# Altium PCB sdram_xsds.PcbDoc
Units mm, origin at the board's own origin, x right, y up, seen from the top; angles counter-clockwise.
Board outline 23.2 x 49.92 mm, 4 copper layers (Top Layer, Signal Layer 2, Signal Layer 1, Bottom Layer), stack 1.651 mm thick; 20 components, 40 nets, 187 pads, 178 vias.
Unrouted connection lines stored in the file: 16.
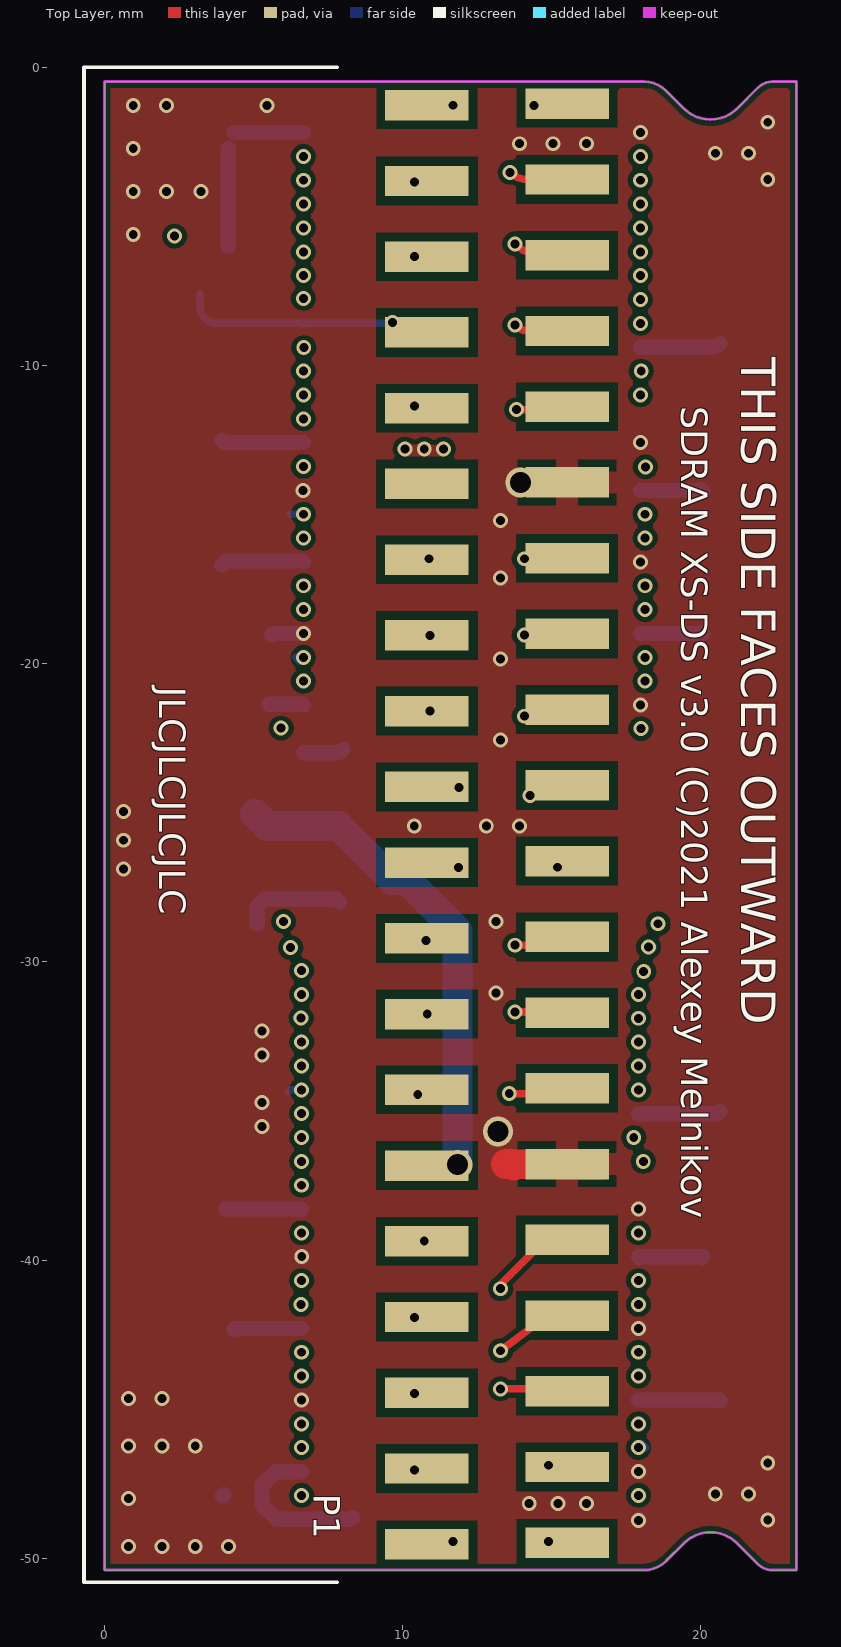
[diagram p0: Top Layer view]
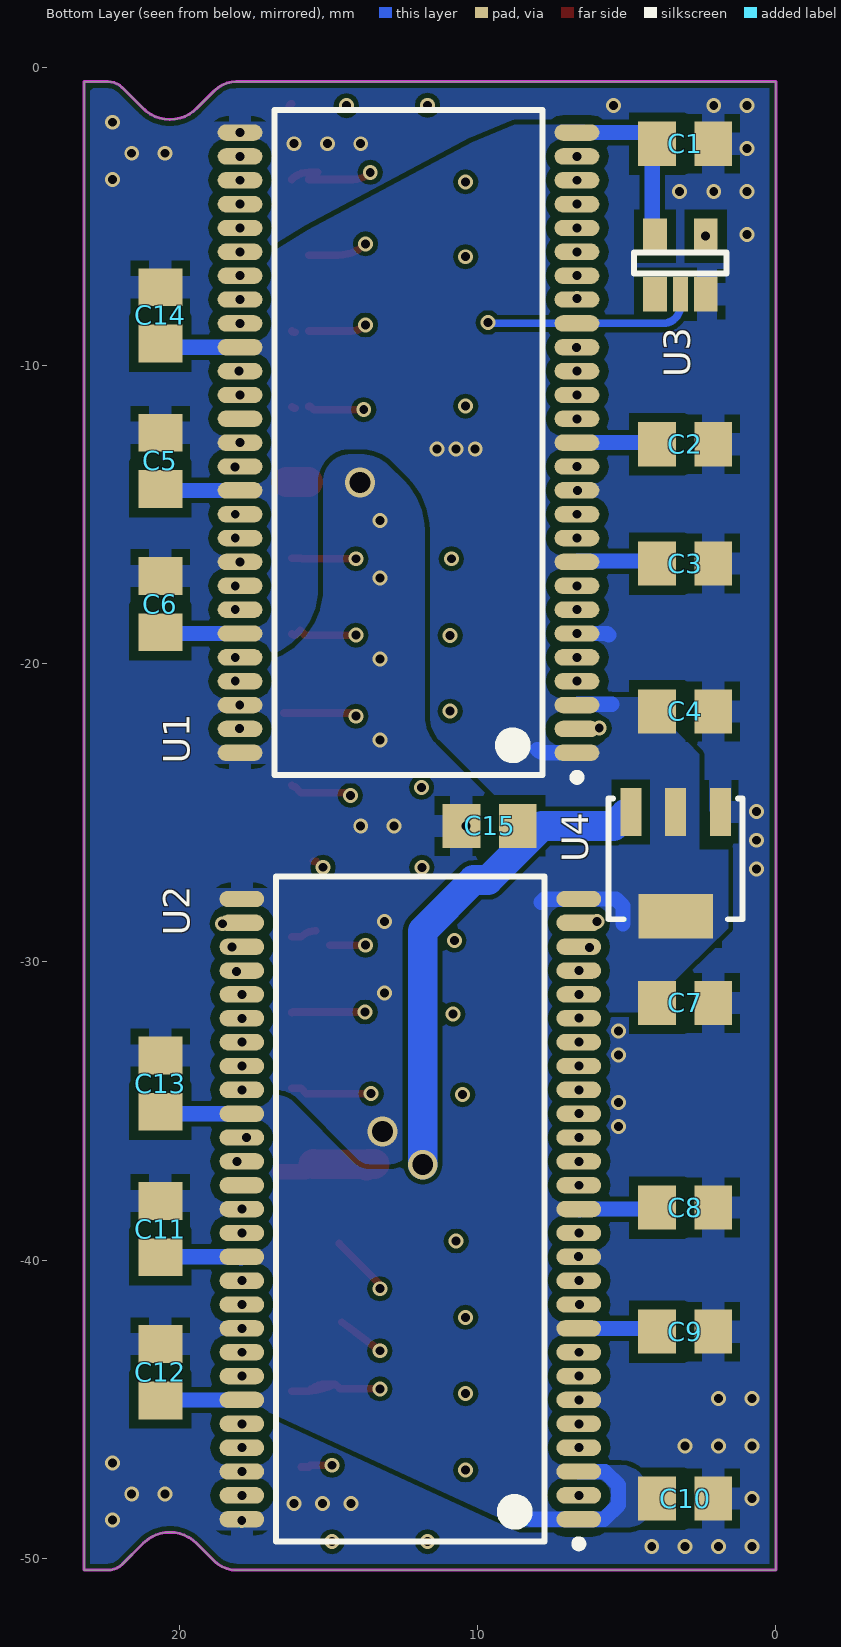
[diagram p1: Bottom Layer view, seen from below]
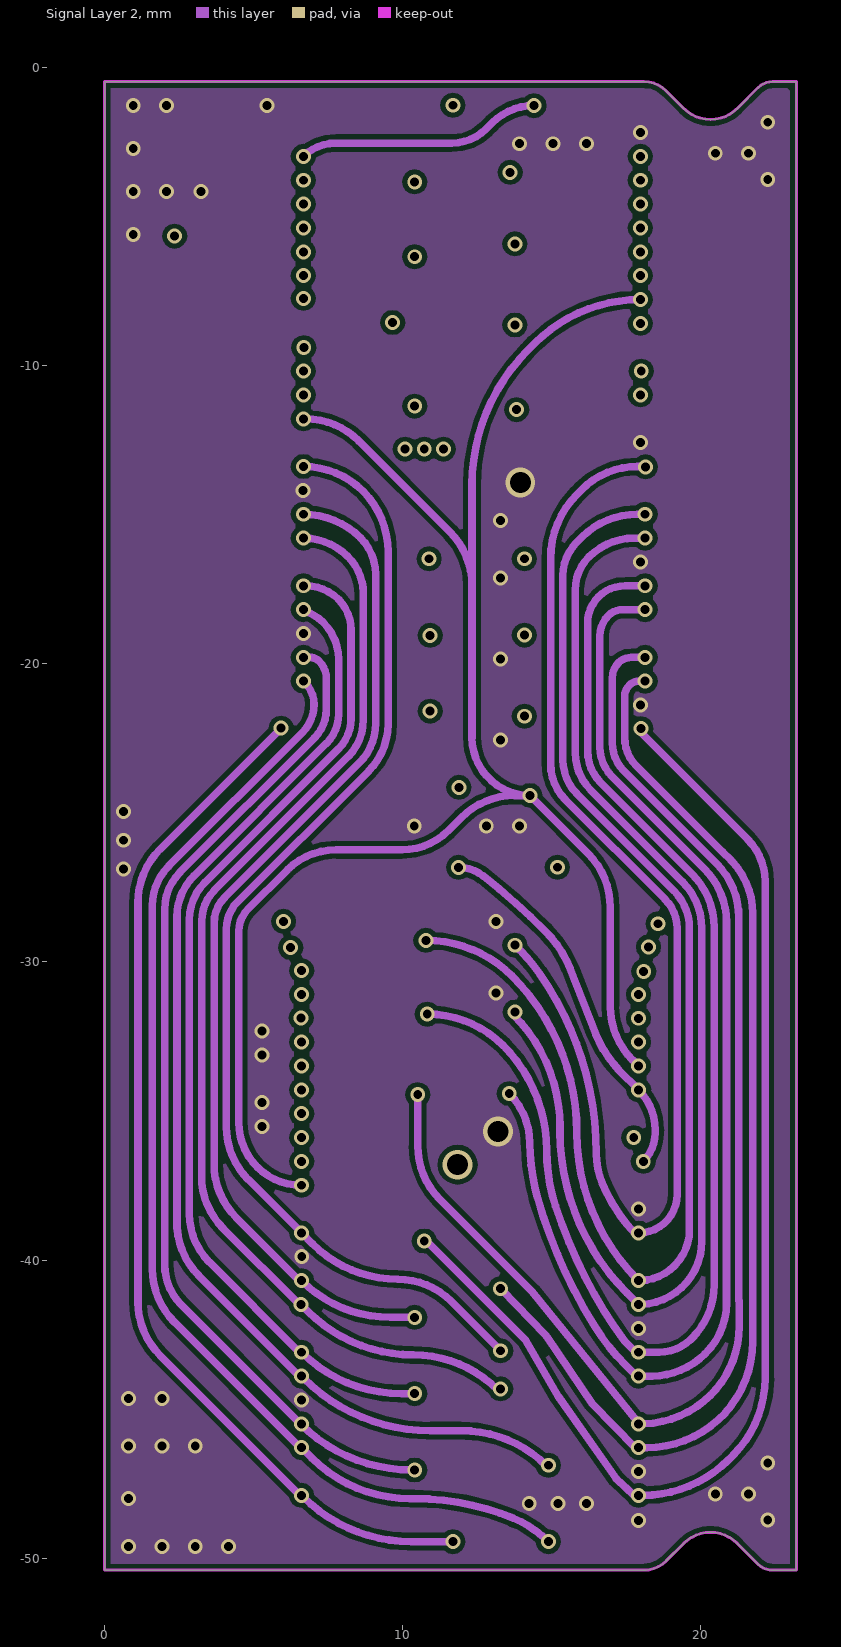
[diagram p2: Signal Layer 2]
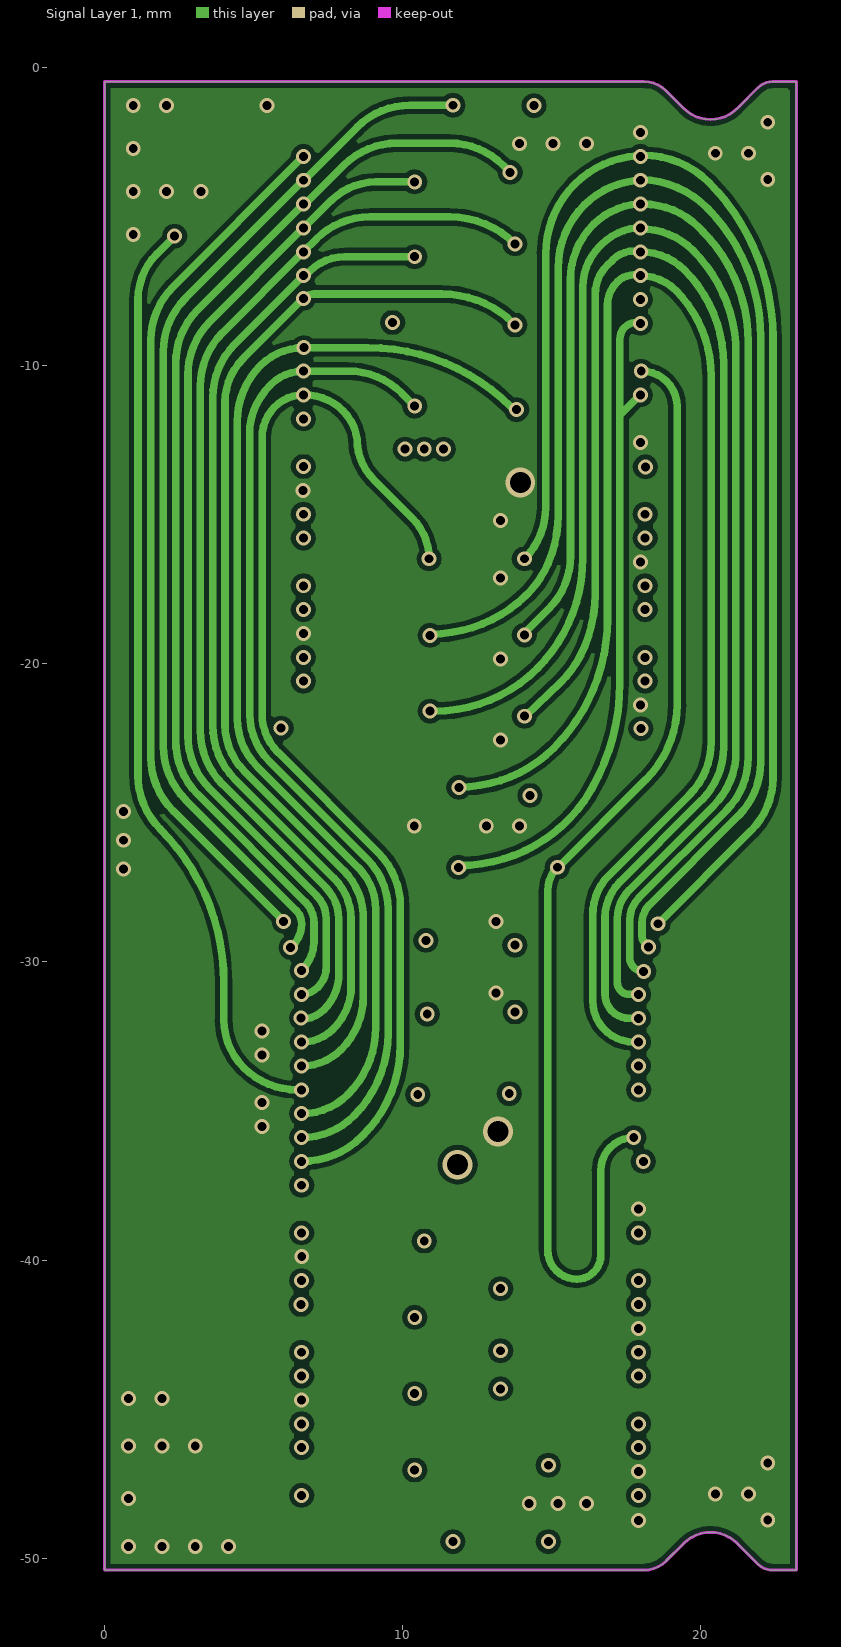
[diagram p3: Signal Layer 1]
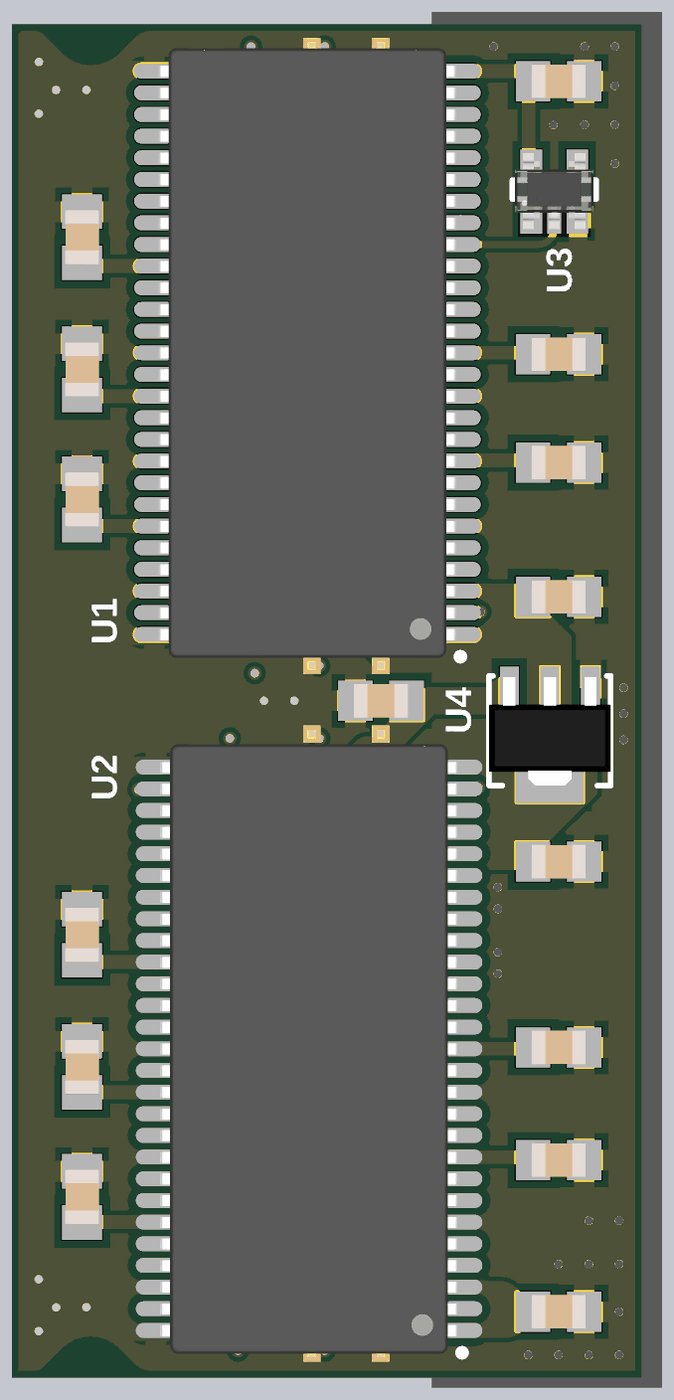
[diagram p4: 3D render of the assembled board from below, using the file's embedded part models]

## Layer stack, top to bottom
Top Solder: solder mask 0.0102, Solder Resist, Dk 3.5
Top Layer: signal copper 0.0356
Dielectric 2: core 0.254, Dk 4.2
Signal Layer 2: signal copper 0.036
Dielectric 5: prepreg 1, Dk 4.2
Signal Layer 1: signal copper 0.036
Dielectric 4: core 0.254, Dk 4.2
Bottom Layer: signal copper 0.0356
Bottom Solder: solder mask 0.0102, Solder Resist, Dk 3.5

## Board outline
0,-50.4 17.145,-50.4 18.08,-50.4 ccw(c18.08,-49.328) 18.838,-50.086 19.422,-49.502 cw(c20.32,-50.4) 20.32,-49.13 cw(c20.32,-50.4) 21.218,-49.502 21.915,-50.199 ccw(c22.4,-49.714) 22.4,-50.4 23.2,-50.4 23.2,-0.48 22.395,-0.48 ccw(c22.395,-1.158) 21.916,-0.678 21.256,-1.338 cw(c20.32,-0.48) 20.32,-1.75 cw(c20.32,-0.48) 19.384,-1.338 18.828,-0.783 ccw(c18.098,-1.514) 18.098,-0.48 17.145,-0.48 9.271,-0.48 0,-0.48

## Design rules (kind name [scope] priority, off if disabled: settings)
BoardOutlineClearance [All] p1: gap=0 ignorepadtopadclearanceinfootprint=FALSE
Clearance keep-out_clearance [InNamedPolygon('power') vs OnLayer('Keep-Out Layer')] p1: gap=0 ignorepadtopadclearanceinfootprint=FALSE
Clearance keep-out_clearance_1 [IsBoardCutoutRegion vs InNamedPolygon('power')] p2: gap=0 ignorepadtopadclearanceinfootprint=FALSE
Clearance [All] p3: gap=0.16 ignorepadtopadclearanceinfootprint=TRUE except(0: Arc-Hole Track-Hole SMDPad-Hole THPad-Hole Via-Hole Fill-Hole Poly-Hole Region-Hole Text-Hole; 0.3: SMDPad-Fill SMDPad-Poly SMDPad-Region THPad-Fill THPad-Poly THPad-Region)
ComponentClearance [All] p1 off: gap=0.254 collisioncheckmode=3 verticalgap=0.254 showdistances=FALSE
Height [All] p1 off: minheight=0 maxheight=25.4 prefheight=12.7
HoleSize [All] p1: absolutevalues=TRUE maxlimit=6 minlimit=0.025 maxpercent=80.000 minpercent=20.000
HoleToHoleClearance [All] p1: gap=0.127 allowstackedmicrovias=TRUE
MinimumSolderMaskSliver [All] p1: minsoldermaskwidth=0.25
PolygonConnect PolygonConnect_2 [IsVia or InNet('VCC')] p1: connectstyle=Direct reliefconductorwidth=0.762 reliefentries=4 polygonreliefangle="90 Angle" airgapwidth=0.254
PolygonConnect [All] p2: connectstyle=Relief reliefconductorwidth=0.762 reliefentries=4 polygonreliefangle="90 Angle" airgapwidth=0.254
RoutingCorners [All] p1: cornerstyle=Round minsetback=2.54 maxsetback=2.54
RoutingVias [All] p1: holewidth=0.3 width=0.5 viastyle="Through Hole" minholewidth=0.3 minwidth=0.5 maxholewidth=1 maxwidth=1.5
ShortCircuit [IsBoardCutoutRegion] p1: allowed=TRUE
ShortCircuit ShortCircuit_1 [All] p2: allowed=FALSE
SilkToSolderMaskClearance [IsPad] p1 off: minsilkscreentomaskgap=0.127 clearancetoexposedcopper=TRUE
SolderMaskExpansion SolderMaskExpansion_U1 [InComponent('U1')] p1: expansion=0 istentingtop=FALSE
SolderMaskExpansion [All] p2: expansion=0.051 istentingtop=FALSE
Width Width_power [InNetClass('power')] p1: maxlimit=2 minlimit=0.254 preferedwidth=0.508 midlayer1_maxwidth=0.254 midlayer1_prefwidth=0.254 midlayer2_maxwidth=0.254 midlayer2_prefwidth=0.254 minimp=50.000000 maximp=50.000000 favimp=50.000000
Width Width_signal [All] p2: maxlimit=0.254 minlimit=0.254 preferedwidth=0.254
22 further rules are at their usual default settings.

## Classes and differential pairs
net class power: GND VCC VDD
component class sdram_xsds: C5 C6 C7 C8 C9 C10 C11 C12 C13 C14 C15 P1 P2R U1 U2 U3 U4

## Components (designator, comment, footprint, x,y, rotation, side; value= is the part's Value field where it differs from the comment)
C1 "C0805" C0805 3.04,-2.56 r0 bottom value=1uF
C2 "C0805" C0805 3.04,-12.64 r0 bottom value=1uF
C3 "C0805" C0805 3.04,-16.64 r0 bottom value=1uF
C4 "C0805" C0805 3.04,-21.6 r0 bottom value=1uF
C5 "+" C0805 20.64,-13.2 r270 bottom value=1uF
C6 "+" C0805 20.64,-18 r270 bottom value=1uF
C7 "C0805" C0805 3.04,-31.377 r0 bottom value=1uF
C8 "C0805" C0805 3.04,-38.24 r0 bottom value=1uF
C9 "+" C0805 3.04,-42.4 r0 bottom value=1uF
C10 "C0805" C0805 3.04,-48 r0 bottom value=1uF
C11 "C0805" C0805 20.64,-38.96 r270 bottom value=1uF
C12 "+" C0805 20.64,-43.76 r270 bottom value=1uF
C13 "+" C0805 20.64,-34.08 r270 bottom value=1uF
C14 "+" C0805 20.64,-8.32 r270 bottom value=1uF
C15 "+" C0805 9.6,-25.44 r180 bottom value=10uF
P1 "Header 20X2" "HDR20x2_90 SMD" 9.609,-49.53 r270 top
U1 "AS4C32M16SB-6TIN" TSOP54#1 12.318,-12.586 r0 bottom
U2 "AS4C32M16SB-6TIN" TSOP54#2 12.256,-38.291 r0 bottom
U3 "LVC1G04" SOT23/70-5 3.2,-6.56 r90 bottom
U4 "LM1117" SOT89 3.36,-26.72 r270 bottom

## Footprints (in the part's own frame and the unit in brackets; to place one, negate y for a bottom-side part, rotate by r counter-clockwise, add the part's x,y. Pads: shape width x height; smd on the part's side, far side on the other; paste and mask are expansions set on the pad)
C0805 [mm] "Capacitor, Chip; 2.35 mm L X 1.35 mm W X 1.00 mm H body"
  rect 1.27x1.48 smd: 1(-0.945,0) 2(0.945,0)
  body extent -1,-0.63 1,0.63, height 0.58
"HDR20x2_90 SMD" [mm] "Header, Right Angle Receptacle, 2.54 mm pitch; 0.65 mm lead width, 40 pins, 2 rows, 20 pins per row, 50.80 mm L X 8.50 mm W X 5.08 mm H body"
  rect 1.02x2.8 smd: 1(0,1.2) 2(-0.05,5.9) 3(-2.54,1.2) 4(-2.59,5.9) 5(-5.08,1.2) 6(-5.13,5.9) 7(-7.62,1.2) 8(-7.67,5.9) 9(-10.16,1.2) 10(-10.21,5.9) 11(-12.7,1.2) 12(-12.75,5.9) 13(-15.24,1.2) 14(-15.29,5.9) 15(-17.78,1.2) 16(-17.83,5.9) 17(-20.32,1.2) 18(-20.37,5.9) 19(-22.86,1.2) 20(-22.91,5.9) 21(-25.4,1.2) 22(-25.45,5.9) 23(-27.94,1.2) 24(-27.99,5.9) 25(-30.48,1.2) 26(-30.53,5.9) 27(-33.02,1.2) 28(-33.07,5.9) 29(-35.56,1.2) 30(-35.61,5.9) 31(-38.1,1.2) 32(-38.15,5.9) 33(-40.64,1.2) 34(-40.69,5.9) 35(-43.18,1.2) 36(-43.23,5.9) 37(-45.72,1.2) 38(-45.77,5.9) 39(-48.26,1.2) 40(-48.31,5.9)
  silkscreen extent -49.53,-10.3 1.27,-1.8, body extent -49.53,-10.39 1.27,2.87, height 5.08
SOT23/70-5 [mm] "SOT23 and SOT70-5 universal footprint"
  rect 1.168x0.8 smd: 1(-1.05,0.85) 3(-1.05,-0.85) 4(0.9,-0.85) 5(0.9,0.85)
  rect 1.168x0.5 smd: 2(-1.05,0)
  silkscreen extent -0.35,-1.55 0.35,1.55, body extent -1.46,-1.45 1.36,1.45, height 1.4
SOT89 [mm] "SOT89"
  rect 1.6x0.7 smd mask+0.051: 1(-1.75,1.5) 2(-1.75,0) 3(-1.75,-1.5)
  rect 1.5x2.5 smd mask+0.051: 2(1.75,0)
  silkscreen extent -2.2,-2.25 1.85,2.25, body extent -2.15,-2.25 1.85,2.25, height 1.5
TSOP54#1 [mm] "SOP, 54-Leads, Body 22.3x10.2mm, Pitch 0.8mm, IPC Medium Density"
  oval 1.5x0.55 smd: 1(-5.65,10.4) 2(-5.65,9.6) 3(-5.65,8.8) 4(-5.65,8) 5(-5.65,7.2) 6(-5.65,6.4) 7(-5.65,5.6) 8(-5.65,4.8) 9(-5.65,4) 10(-5.65,3.2) 11(-5.65,2.4) 12(-5.65,1.6) 13(-5.65,0.8) 14(-5.65,0) 15(-5.65,-0.8) 16(-5.65,-1.6) 17(-5.65,-2.4) 18(-5.65,-3.2) 19(-5.65,-4) 20(-5.65,-4.8) 21(-5.65,-5.6) 22(-5.65,-6.4) 23(-5.65,-7.2) 24(-5.65,-8) 25(-5.65,-8.8) 26(-5.65,-9.6) 27(-5.65,-10.4) 28(5.65,-10.4) 29(5.65,-9.6) 30(5.65,-8.8) 31(5.65,-8) 32(5.65,-7.2) 33(5.65,-6.4) 34(5.65,-5.6) 35(5.65,-4.8) 36(5.65,-4) 37(5.65,-3.2) 38(5.65,-2.4) 39(5.65,-1.6) 40(5.65,-0.8) 41(5.65,0) 42(5.65,0.8) 43(5.65,1.6) 44(5.65,2.4) 45(5.65,3.2) 46(5.65,4) 47(5.65,4.8) 48(5.65,5.6) 49(5.65,6.4) 50(5.65,7.2) 51(5.65,8) 52(5.65,8.8) 53(5.65,9.6) 54(5.65,10.4)
  silkscreen extent -5.77,-11.15 4.5,11.35, body extent -5.88,-11.25 5.88,11.27, height 1
TSOP54#2 [mm] "SOP, 54-Leads, Body 22.3x10.2mm, Pitch 0.8mm, IPC Medium Density"
  oval 1.5x0.55 smd mask+0: 1(-5.65,10.4) 2(-5.65,9.6) 3(-5.65,8.8) 4(-5.65,8) 5(-5.65,7.2) 6(-5.65,6.4) 7(-5.65,5.6) 8(-5.65,4.8) 9(-5.65,4) 10(-5.65,3.2) 11(-5.65,2.4) 12(-5.65,1.6) 13(-5.65,0.8) 14(-5.65,0) 15(-5.65,-0.8) 16(-5.65,-1.6) 17(-5.65,-2.4) 18(-5.65,-3.2) 19(-5.65,-4) 20(-5.65,-4.8) 21(-5.65,-5.6) 22(-5.65,-6.4) 23(-5.65,-7.2) 24(-5.65,-8) 25(-5.65,-8.8) 26(-5.65,-9.6) 27(-5.65,-10.4) 28(5.65,-10.4) 29(5.65,-9.6) 30(5.65,-8.8) 31(5.65,-8) 32(5.65,-7.2) 33(5.65,-6.4) 34(5.65,-5.6) 35(5.65,-4.8) 36(5.65,-4) 37(5.65,-3.2) 38(5.65,-2.4) 39(5.65,-1.6) 40(5.65,-0.8) 41(5.65,0) 42(5.65,0.8) 43(5.65,1.6) 44(5.65,2.4) 45(5.65,3.2) 46(5.65,4) 47(5.65,4.8) 48(5.65,5.6) 49(5.65,6.4) 50(5.65,7.2) 51(5.65,8) 52(5.65,8.8) 53(5.65,9.6) 54(5.65,10.4)
  silkscreen extent -5.77,-11.15 4.5,11.35, body extent -5.88,-11.25 5.88,11.27, height 1

## Part data
C1 C2 C3 C4 C7 C8 C10 C11: "Ceramic Chip Capacitor - Standard", PackageDocument=Mar-2001, Code_IPC=2012[0805], Code_JEITA=0805, ComponentLink1Description="Manufacturer Link", ComponentLink1URL=http://www.kemet.com/, ComponentLink2Description=Datasheet, ComponentLink2URL=http://www.kemet.com/kemet/web/homepage/kechome.nsf/vapubfilesname/F3102TA.pdf/$file/F3102TA.pdf, DatasheetDocument=Mar-2001, LatestRevisionDate=19-Mar-2004, LatestRevisionNote="Silkscreen size reduced.", Note="Footprint corresponds to dimensions for bulk cassette packaging. This case size has tightened tolerances.", PackageReference=0805, Published=17-Jul-2002, Publisher="Altium Limited"
C5 C6 C9 C12 C13 C14 C15: library part C0805, "Ceramic Chip Capacitor - Standard", PackageDocument=Mar-2001, Code_IPC=2012[0805], Code_JEITA=0805, ComponentLink1Description="Manufacturer Link", ComponentLink1URL=http://www.kemet.com/, ComponentLink2Description=Datasheet, ComponentLink2URL=http://www.kemet.com/kemet/web/homepage/kechome.nsf/vapubfilesname/F3102TA.pdf/$file/F3102TA.pdf, DatasheetDocument=Mar-2001, LatestRevisionDate=19-Mar-2004, LatestRevisionNote="Silkscreen size reduced.", Note="Footprint corresponds to dimensions for bulk cassette packaging. This case size has tightened tolerances.", PackageReference=0805, Published=17-Jul-2002, Publisher="Altium Limited"
P1: "Header, 20-Pin, Dual row", LatestRevisionDate=17-Jul-2002, LatestRevisionNote="Re-released for DXP Platform.", Publisher="Altium Limited"
U1 U2: library part AS4C16M16SA-6TCN, "256Mb SDR SDRAM, 16Mb x 16, 6ns, 3.3V, 54-Pin TSOP", Manufacturer=Micron, Op. Temp.="0C to +70C", PartNumber=MT48LC16M16A2P-6A, Voltage=3.3V, CL="CL = 3", Clock Rate="167 MHz", ComponentLink1Description="Manufacturer URL", ComponentLink1URL=http://www.micron.com/, ComponentLink2Description=Datasheet, ComponentLink2URL=http://www.micron.com/~/media/Documents/Products/Data%20Sheet/DRAM/256Mb_sdr.pdf, ComponentLink3Description="Package Specification", ComponentLink3URL=http://www.micron.com/~/media/Documents/Products/Data%20Sheet/DRAM/128mb_x4x8x16_sdram.pdf, Cycle Time=6ns, Data Rate=PC133, DatasheetVersion=Rev.Q, Density=256Mb, Depth=16Mb, Mounting Technology="Surface Mount", PackageDescription="54-Pin Thin Small Outline Package, 10.16 x 22.22 mm, Pitch 0.8 mm", PackageReference=MICT-P-54, PackageVersion=Rev.Q, RoHS=Yes, Width=x16
U3: "INVERTER", Geometry.Height=1.45mm, Supplier_Name=RS

## Via types
v1: diameter 0.5, hole 0.3, Top Layer to Bottom Layer, tented both sides, 172 vias
v2: diameter 0.5, hole 0.3, Top Layer to Bottom Layer, tented bottom, 3 vias
v3: diameter 1, hole 0.7, Top Layer to Bottom Layer, 2 vias
v4: diameter 1, hole 0.7, Top Layer to Bottom Layer, tented both sides, 1 vias

## Nets (pads, with @x,y where several pads share a name; then routed paths per layer and width w, separated by ;. In a path a pad name is that pad's centre, name@x,y a point inside that pad or via, vN(x,y) a via of type N, cw(c..) or ccw(c..) an arc to the next point about the centre after c; other vN are vias at no path point)
A0: P1.37 U1.23 U2.23 | length 33.9
  Signal Layer 1 w0.254: v1(6.606,-31.091) 6.516,-31.091 6.487,-31.12 ccw(c6.487,-30.171) 7.158,-30.842 ccw(c6.487,-30.171) 7.436,-30.171 7.436,-28.56 ccw(c6.346,-28.56) 7.117,-27.789 3.54,-24.212 cw(c5.336,-22.416) 2.796,-22.416 2.796,-10.31 cw(c5.336,-10.31) 3.54,-8.514 v1(6.668,-5.386) 6.679,-5.386 7.585,-4.48 cw(c9.13,-6.025) 9.098,-3.84 cw(c9.13,-6.025) 9.13,-3.84 v1(10.4,-3.84)
A1: P1.38 U1.24 U2.24 | length 40.3
  Top Layer w0.254: v1(13.6,-3.52) ccw(c14.179,-2.941) 14.179,-3.76 P1.38 P1.38@15.669,-3.76 ; P1.38@15.36,-3.52 15.66,-3.52 cw(c15.66,-4.339) P1.38@16.239,-3.76
  Signal Layer 1 w0.254: v1(6.606,-30.291) ccw(c5.594,-29.279) 7.022,-29.364 7.022,-28.707 ccw(c5.991,-28.707) 6.72,-27.978 3.126,-24.384 cw(c4.922,-22.588) 2.382,-22.588 2.382,-9.924 cw(c4.922,-9.924) 3.126,-8.128 v1(6.668,-4.586) 6.717,-4.586 8.019,-3.284 cw(c9.815,-5.08) 9.815,-2.54 11.568,-2.54 cw(c11.568,-5.08) 13.364,-3.284 v1(13.6,-3.52)
A2: P1.39 U1.25 U2.25 | length 35.4
  Signal Layer 1 w0.254: v1(6.24,-29.52) 6.303,-29.458 ccw(c5.565,-28.72) 6.608,-28.72 ccw(c5.959,-28.72) 6.418,-28.261 2.712,-24.555 cw(c4.508,-22.759) 1.968,-22.759 1.968,-9.538 cw(c4.508,-9.538) 2.712,-7.742 v1(6.668,-3.786) 6.691,-3.786 8.477,-2 cw(c10.24,-3.763) 10.24,-1.27 v1(11.68,-1.27)
A3: P1.40 U1.26 U2.26 | length 37.8
  Top Layer w0.254: P1.40@16.239,-1.22 cw(c16.239,-1.271) 16.275,-1.235 P1.40@16.32,-1.28
  Signal Layer 2 w0.254: v1(6.668,-2.986) cw(c7.744,-4.063) 7.744,-2.54 11.639,-2.54 ccw(c11.639,-0.898) 12.799,-2.06 12.999,-1.861 cw(c14.4,-3.262) v1(14.4,-1.28)
  Signal Layer 1 w0.254: v1@6.08,-28.72 v1(6,-28.64) 2.298,-24.938 cw(c4.094,-23.142) 1.554,-23.142 1.554,-9.152 cw(c4.094,-9.152) 2.298,-7.356 v1(6.668,-2.986)
A4: P1.28 U1.29 U2.29 | length 47.3
  Top Layer w0.254: v1(14.08,-16.48) 15.871,-16.48 ccw(c15.871,-16.412) 15.919,-16.46 P1.28@16.239,-16.46
  Signal Layer 1 w0.254: v1(14.08,-16.48) ccw(c12.351,-14.751) 14.796,-14.751 14.796,-6.26 ; 14.796,-6.259 cw(c18.105,-6.259) 15.765,-3.919 cw(c18.08,-6.234) 17.863,-2.967 17.973,-2.962 cw(c18.08,-6.234) 18.08,-2.96 v1(17.968,-2.986) v1@18.018,-2.965 ; v1@18.019,-2.965 18.066,-2.945 cw(c18.066,-6.047) 20.261,-3.855 cw(c15.042,-9.064) 22.416,-9.064 22.416,-9.065 22.416,-23.812 cw(c19.876,-23.812) 21.672,-25.608 v1(18.56,-28.72)
A5: P1.25 U1.30 U2.30 | length 49
  Signal Layer 1 w0.254: v1(10.919,-19.05) 10.938,-19.006 ccw(c10.938,-14.419) 14.144,-17.699 14.147,-17.696 ccw(c11.807,-15.308) 14.871,-16.646 ccw(c11.073,-15.006) 15.21,-15.006 15.21,-15.004 15.21,-6.735 15.21,-6.734 cw(c18.204,-6.734) 16.087,-4.617 cw(c18.092,-6.621) 18.023,-3.787 v1(17.968,-3.786) 18.013,-3.768 cw(c17.931,-6.971) 20.201,-4.709 cw(c15.837,-9.063) 22.002,-9.063 22.002,-9.065 ; 18.277,-28.08 ccw(c18.892,-28.695) 18.023,-28.695 18.023,-29.143 ccw(c18.309,-29.143) v1@18.309,-29.429 ; 18.278,-28.08 21.258,-25.1 ccw(c19.462,-23.304) 22.002,-23.304 22.002,-9.065
  Bottom Layer w0.254: v1(18.24,-29.498) 18.37,-29.498 18.392,-29.52 18.4,-29.513 U2.30@18.352,-29.464
A6: P1.26 U1.31 U2.31 | length 48
  Top Layer w0.254: v1(14.08,-19.04) 15.788,-19.04 15.948,-18.88 16.118,-19.05 ccw(c16.118,-18.879) P1.26@16.239,-19
  Signal Layer 1 w0.254: v1(14.08,-19.04) 14.08,-18.977 14.88,-18.177 ccw(c13.084,-16.381) 15.624,-16.381 15.624,-7.121 ; 15.624,-7.12 cw(c18.238,-7.12) 16.39,-5.272 cw(c18.08,-6.964) 17.898,-4.579 17.972,-4.574 cw(c18.08,-6.964) 18.08,-4.572 v1(17.968,-4.586) ; v1@18.066,-4.586 cw(c18.066,-7.194) 19.909,-5.349 20.037,-5.477 cw(c16.289,-9.222) 21.588,-9.222 21.588,-9.224 21.588,-23.133 cw(c19.048,-23.133) 20.844,-24.929 17.92,-27.852 ccw(c18.671,-28.603) 17.609,-28.603 17.609,-29.849 ccw(c18.08,-29.849) v1(18.08,-30.32)
A7: P1.23 U1.32 U2.32 | length 49.8
  Signal Layer 1 w0.254: v1(10.919,-21.59) 11.065,-21.59 11.066,-21.59 ccw(c11.066,-16.735) 14.5,-20.167 ccw(c10.788,-16.455) 16.038,-16.455 16.038,-16.453 16.038,-7.371 cw(c17.977,-7.371) 16.606,-6 16.656,-5.95 cw(c18.08,-7.374) 18.08,-5.36 18.054,-5.386 v1(17.968,-5.386) 17.978,-5.411 cw(c17.978,-7.89) 19.731,-6.137 19.732,-6.139 cw(c16.206,-9.66) 21.174,-9.262 21.174,-9.273 21.174,-22.961 cw(c18.634,-22.961) 20.43,-24.757 17.587,-27.6 ccw(c18.532,-28.545) 17.195,-28.545 17.195,-30.69 ccw(c17.595,-30.69) 17.595,-31.091 v1(17.906,-31.091)
A8: P1.24 U1.33 U2.33 | length 49.1
  Top Layer w0.254: v1@14.032,-21.653 P1.24@16.505,-21.653
  Signal Layer 1 w0.254: v1(14.08,-21.76) ccw(c14.08,-21.691) 14.128,-21.741 15.283,-20.633 ccw(c12.923,-18.172) 15.96,-19.724 15.962,-19.72 ccw(c11.904,-17.666) 16.452,-17.674 16.452,-17.672 16.452,-17.668 16.452,-17.66 16.452,-7.613 cw(c17.828,-7.613) 16.855,-6.64 17.034,-6.461 cw(c17.76,-7.186) 17.76,-6.16 17.786,-6.186 v1(17.968,-6.186) cw(c17.968,-8.288) 19.454,-6.802 19.456,-6.803 cw(c16.299,-9.955) 20.76,-9.955 20.76,-9.956 20.76,-22.79 cw(c18.22,-22.79) 20.016,-24.586 17.28,-27.321 ccw(c18.485,-28.526) 16.781,-28.526 16.781,-31.081 ccw(c17.59,-31.081) 17.59,-31.891 v1(17.906,-31.891)
A9: P1.21 U1.34 U2.34 | length 49.6
  Signal Layer 1 w0.254: v1@11.881,-24.138 ccw(c11.881,-19.615) 15.078,-22.814 15.08,-22.812 ccw(c10.767,-18.5) 16.866,-18.5 16.866,-18.498 16.866,-7.979 cw(c17.979,-7.979) 17.192,-7.192 cw(c17.752,-7.752) v1@17.752,-6.96 ; v1(17.906,-32.691) 17.76,-32.691 cw(c17.76,-31.298) 16.367,-31.298 16.367,-28.443 cw(c18.348,-28.443) 16.77,-27.245 19.602,-24.414 ccw(c17.806,-22.618) 20.346,-22.618 20.346,-10.358 20.346,-10.357 ccw(c16.273,-10.357) 19.151,-7.475 ccw(c17.968,-8.663) v1(17.968,-6.986)
  other v1: 11.881,-24.147
A10: P1.36 U1.22 U2.22 | length 39.4
  Top Layer w0.254: v1(13.76,-5.92) ccw(c14.677,-5.003) 14.677,-6.3 P1.36 P1.36@15.669,-6.3
  Signal Layer 1 w0.254: v1(6.592,-31.877) 6.592,-31.915 6.587,-31.92 ccw(c6.587,-30.827) 7.359,-31.601 ; 7.361,-31.599 ccw(c6.157,-30.397) 7.85,-30.563 7.85,-28.56 ccw(c6.346,-28.56) 7.41,-27.497 3.954,-24.041 cw(c5.75,-22.245) 3.21,-22.245 3.21,-10.696 cw(c5.75,-10.696) 3.954,-8.9 v1(6.668,-6.186) 7.093,-5.76 cw(c8.889,-7.557) 8.889,-5.017 11.577,-5.017 11.579,-5.017 cw(c11.579,-8.101) v1(13.76,-5.92)
  Bottom Layer w0.254: U2.22@6.414,-31.877 v1(6.592,-31.877) U2.22
A11: P1.22 U1.15 U1.35 U2.15 U2.35 | length 62.9
  Top Layer w0.254: v1(14.265,-24.418) 14.363,-24.32 15.928,-24.32 16.118,-24.13 ccw(c16.118,-23.959) P1.22@16.239,-24.08
  Signal Layer 2 w0.254: 5.121,-36.881 ccw(c6.594,-35.406) 6.594,-37.491 v1(6.606,-37.491) ; 5.12,-36.88 cw(c6.622,-35.378) 4.498,-35.378 4.498,-28.969 cw(c5.529,-28.969) 4.8,-28.24 6.12,-26.92 ; 6.12,-26.92 cw(c7.762,-28.562) 7.762,-26.24 9.975,-26.24 ccw(c9.975,-24.055) 11.52,-25.6 11.958,-25.162 cw(c13.754,-26.958) 13.754,-24.418 v1(14.265,-24.418) ; v1(6.668,-11.786) 6.734,-11.786 cw(c6.734,-14.326) 8.53,-12.53 11.576,-15.576 cw(c9.78,-17.372) 12.32,-17.372 ; v1(17.906,-33.491) 17.704,-33.289 cw(c19.5,-31.493) 16.96,-31.493 16.96,-28.165 ccw(c14.42,-28.165) 16.216,-26.369 v1(14.265,-24.418) ; v1(17.968,-7.786) ccw(c17.968,-12.792) 14.427,-9.253 14.192,-9.488 ccw(c18.709,-14.007) 12.32,-14.007 12.32,-14.008 12.32,-17.372 ; 12.32,-17.372 12.32,-22.473 ccw(c14.265,-22.473) v1(14.265,-24.418)
A12: P1.19 U1.36 U1.39 U2.36 U2.39 | length 35.5
  Signal Layer 2 w0.254: v1(11.871,-26.831) cw(c11.871,-28.17) 12.702,-27.119 cw(c-2.303,-46.057) 14.783,-28.973 cw(c12.066,-31.686) 15.613,-30.216 15.614,-30.219 16.474,-32.435 16.475,-32.438 ccw(c20.231,-30.851) 17.25,-33.633 v1(17.907,-34.29) cw(c16.565,-35.632) 18.463,-35.632 18.463,-35.732 cw(c17.107,-35.732) v1(18.066,-36.691)
  Signal Layer 1 w0.254: v1@12.019,-26.844 11.884,-26.844 v1(11.871,-26.831) 11.892,-26.766 ccw(c11.892,-21.625) 16.081,-24.604 16.083,-24.601 ccw(c10.126,-20.64) 17.28,-20.64 17.28,-20.638 17.28,-11.674 ; 17.44,-8.72 ccw(c17.826,-9.106) 17.28,-9.106 17.28,-11.674 ; 17.44,-8.72 cw(c17.826,-9.106) 17.826,-8.56 17.852,-8.586 v1(17.968,-8.586) ; v1(17.968,-10.986) 17.28,-11.674
  Bottom Layer w0.254: v1(17.907,-34.29) U2.36@17.937,-34.32
BA0: P1.34 U1.20 U2.20 | length 39.1
  Top Layer w0.254: v1(13.76,-8.64) ccw(c14.243,-8.157) 14.243,-8.84 P1.34 P1.34@15.669,-8.84 ; P1.34@16.118,-8.89 ccw(c16.118,-8.719) P1.34@16.239,-8.84
  Signal Layer 1 w0.254: v1(6.606,-33.491) ccw(c6.606,-31.608) 7.937,-32.939 ccw(c6.147,-31.149) 8.678,-31.149 8.678,-28.366 ccw(c6.373,-28.56) 8.009,-26.925 ; 8.009,-26.925 4.684,-23.6 cw(c6.244,-22.04) 4.038,-22.04 4.038,-11.228 cw(c6.093,-11.228) 4.64,-9.775 v1(6.668,-7.747) cw(c7.022,-8.102) 7.022,-7.6 11.301,-7.6 11.303,-7.6 cw(c11.303,-11.059) 13.749,-8.613 v1(13.76,-8.64)
BA1: P1.35 U1.21 U2.21 | length 33.4
  Signal Layer 1 w0.254: v1(6.606,-32.691) ccw(c6.606,-31.186) 7.669,-32.251 ccw(c6.203,-30.786) 8.264,-30.997 8.264,-30.983 8.264,-28.56 ccw(c6.346,-28.56) 7.703,-27.204 ; 6.88,-6.836 6.73,-6.986 v1(6.668,-6.986) 4.368,-9.286 ccw(c6.164,-11.082) 3.624,-11.082 3.624,-22.073 ccw(c6.164,-22.073) 4.368,-23.869 7.702,-27.203 ; 6.881,-6.835 cw(c8.053,-8.009) 8.053,-6.35 v1(10.4,-6.35)
CAS: P1.31 U1.17 U2.17 | length 34
  Signal Layer 1 w0.254: 4.866,-21.68 ccw(c7.113,-21.68) 5.524,-23.269 8.807,-26.552 ; 4.866,-21.68 4.866,-12.07 4.866,-12.052 cw(c7.323,-12.394) 5.568,-10.641 cw(c6.668,-11.742) v1(6.668,-10.186) 8.174,-10.186 cw(c8.174,-12.726) 9.97,-10.93 v1(10.4,-11.36) ; v1(6.606,-35.891) ccw(c6.606,-33.406) 8.362,-35.163 ccw(c5.602,-32.402) 9.506,-32.402 9.506,-28.24 ccw(c7.118,-28.24) 8.807,-26.552
CLK: P1.20 U1.38 U2.38 | length 39.6
  Top Layer w0.254: v1(15.184,-26.825) 15.215,-26.825 15.42,-26.62 P1.20
  Signal Layer 1 w0.254: 14.859,-27.612 14.859,-39.659 ccw(c15.84,-39.659) 15.84,-40.64 ccw(c15.84,-39.84) 16.64,-39.84 16.64,-36.996 cw(c17.746,-36.996) v1(17.746,-35.891) ; 14.859,-27.611 cw(c15.971,-27.611) v1(15.184,-26.825) 15.214,-26.825 18.156,-23.883 ccw(c15.636,-21.363) 19.2,-21.363 19.2,-11.378 ccw(c18.008,-11.378) 18.008,-10.186 v1(17.997,-10.186)
CS1: P1.33 U1.19 U3.2 | length 7.2
  Bottom Layer w0.254: U3.2 3.2,-8 ccw(c3.786,-8) 3.786,-8.586 U1.19 ; U1.19@6.647,-8.607 U1.19 ; v1@9.657,-8.586 U1.19
  other v1: 9.657,-8.556
CS2: U2.19 U3.4 | length 31.9
  Signal Layer 1 w0.254: v1(2.35,-5.66) 1.751,-6.259 ccw(c3.274,-7.782) 1.12,-7.782 1.12,-23.748 ccw(c3.66,-23.748) 1.863,-25.543 1.867,-25.547 cw(c-3.293,-30.701) 4,-30.701 4,-30.702 4,-31.937 ccw(c6.276,-31.937) 4.667,-33.547 ccw(c6.463,-31.751) 6.463,-34.291 v1(6.606,-34.291)
  Bottom Layer w0.254: U2.19@6.16,-34.354 6.222,-34.291 v1(6.606,-34.291)
DQ0: P1.1 U1.2 U2.2 | length 35.3
  Signal Layer 2 w0.254: v1(5.92,-22.16) 1.864,-26.216 ccw(c3.66,-28.012) 1.12,-28.012 1.12,-41.406 ccw(c3.66,-41.406) 1.864,-43.202 6.552,-47.891 v1(6.606,-47.891) 6.652,-47.937 6.653,-47.938 ccw(c10.279,-44.313) 10.279,-49.44 10.28,-49.44 v1(11.68,-49.44)
DQ1: P1.2 U1.4 U2.4 | length 39.1
  Signal Layer 2 w0.254: v1(6.668,-20.586) 6.725,-20.644 cw(c6.009,-21.36) 7.022,-21.36 cw(c5.671,-21.36) 6.626,-22.315 2.142,-26.8 ccw(c3.449,-28.108) 1.6,-28.108 1.6,-40.289 ccw(c4.14,-40.289) 2.344,-42.085 6.56,-46.302 6.571,-46.291 v1(6.606,-46.291) 6.952,-46.637 6.954,-46.639 ccw(c10.24,-43.353) 10.24,-48 10.401,-48 cw(c10.399,-56.652) 13.709,-48.658 cw(c12.329,-51.993) v1(14.88,-49.44)
  Bottom Layer w0.254: U1.4@6.642,-20.56 v1(6.668,-20.586)
DQ2: P1.3 U1.5 U2.5 | length 35.1
  Signal Layer 2 w0.254: v1(6.606,-45.491) v1@6.565,-45.491 ; v1(6.668,-19.786) 6.876,-19.786 cw(c6.876,-20.244) 7.2,-19.92 cw(c6.63,-20.49) 7.436,-20.49 7.436,-21.531 cw(c6.084,-21.531) 7.041,-22.486 ; 7.04,-22.487 2.528,-26.999 ccw(c3.769,-28.24) 2.014,-28.24 2.014,-40.167 ccw(c3.878,-40.167) 2.56,-41.486 6.56,-45.486 v1@6.565,-45.491 ; v1(10.4,-47.04) 10.307,-47.04 10.306,-47.04 cw(c10.306,-41.75) v1@6.565,-45.491
  Bottom Layer w0.254: U1.5@6.399,-19.786 6.533,-19.92 v1(6.668,-19.786) U1.5@6.399,-19.786
DQ3: P1.4 U1.7 U2.7 | length 40.1
  Top Layer w0.254: v1(14.88,-46.88) 15.609,-46.88 15.669,-46.94 P1.4@15.919,-46.94
  Signal Layer 2 w0.254: v1@6.659,-18.218 cw(c6.24,-19.705) 7.332,-18.612 ; 7.333,-18.613 cw(c6.083,-19.862) 7.85,-19.862 7.85,-21.68 cw(c6.444,-21.68) 7.439,-22.674 2.993,-27.12 ccw(c4.356,-28.483) 2.428,-28.483 2.428,-38.931 ccw(c4.96,-38.728) 3.164,-40.524 6.53,-43.891 v1(6.606,-43.891) 6.679,-43.964 6.681,-43.966 ccw(c10.916,-39.73) 10.916,-45.72 10.918,-45.72 11.967,-45.72 11.968,-45.72 cw(c11.968,-49.759) 14.824,-46.903 v1(14.88,-46.88)
  other v1: 6.668,-18.186
DQ4: P1.5 U1.8 U2.8 | length 34.4
  Signal Layer 2 w0.254: v1(6.668,-17.386) 6.744,-17.386 cw(c6.744,-18.936) 7.84,-17.84 cw(c6.816,-18.864) 8.264,-18.864 8.264,-21.84 cw(c6.83,-21.84) 7.844,-22.854 3.36,-27.338 ccw(c4.611,-28.589) 2.842,-28.589 2.842,-38.443 ccw(c5.157,-38.443) 3.52,-40.08 6.53,-43.091 v1(6.606,-43.091) ccw(c9.96,-39.736) 9.96,-44.48 9.962,-44.48 v1(10.4,-44.48)
DQ5: P1.6 U1.10 U2.10 | length 41.8
  Top Layer w0.254: v1(13.28,-44.32) 14.614,-44.32 P1.6@14.774,-44.16 ; P1.6@15.669,-44.4 ccw(c15.09,-44.979) P1.6@15.662,-44.393 ; P1.6@16.239,-44.4 15.852,-44.4 cw(c15.852,-41.86) P1.6@15.662,-44.393 ; P1.6@14.774,-44.16 ccw(c15.852,-41.86) P1.6@15.662,-44.393 ; P1.6@14.774,-44.16 15.09,-44.16 cw(c15.09,-44.979) P1.6@15.662,-44.393
  Signal Layer 2 w0.254: v1(6.668,-15.786) cw(c6.667,-17.892) 8.155,-16.401 cw(c6.898,-17.661) 8.678,-17.661 8.678,-17.663 8.678,-21.873 cw(c6.909,-21.873) 8.16,-23.124 3.684,-27.6 ccw(c4.716,-28.632) 3.256,-28.632 3.256,-37.419 ccw(c5.782,-37.15) 3.986,-38.946 6.56,-41.52 v1(6.589,-41.491) 6.812,-41.713 6.814,-41.715 ccw(c10.351,-38.178) 10.351,-43.18 10.353,-43.18 cw(c10.351,-47.197) 13.192,-44.357 v1(13.28,-44.32)
DQ6: P1.7 U1.11 U2.11 | length 35
  Signal Layer 2 w0.254: v1(6.668,-14.986) cw(c6.667,-17.696) 8.582,-15.778 cw(c7.357,-17.006) 9.092,-17.006 9.092,-17.008 9.092,-22 cw(c7.216,-22) 8.543,-23.326 ; 8.543,-23.326 4.021,-27.849 ccw(c4.867,-28.695) 3.67,-28.695 3.67,-36.778 ccw(c6.21,-36.778) 4.414,-38.574 6.531,-40.691 v1(6.606,-40.691) ccw(c9.574,-37.722) 9.574,-41.92 9.575,-41.92 v1(10.4,-41.92)
  Bottom Layer w0.254: U1.11@6.223,-14.986 v1(6.668,-14.986)
DQ7: P1.8 U1.13 U2.13 | length 41.6
  Top Layer w0.254: v1@13.28,-42.907 v1(13.28,-43.04) 14.559,-42.081 v1@13.344,-42.992
  Signal Layer 2 w0.254: v1(6.668,-13.386) cw(c6.667,-16.215) 8.672,-14.219 cw(c6.644,-16.238) 9.506,-16.238 9.506,-16.24 9.506,-22.027 cw(c7.282,-22.027) 8.855,-23.6 4.352,-28.103 ccw(c5.406,-28.9) 4.084,-28.9 4.084,-35.517 ccw(c6.624,-35.517) 4.828,-37.313 v1(6.606,-39.091) 6.971,-39.456 6.972,-39.457 ccw(c9.828,-36.601) 9.83,-40.64 cw(c9.828,-43.18) 11.624,-41.384 v1(13.28,-43.04)
DQ8: P1.18 U1.42 U2.42 | length 42.7
  Top Layer w0.254: v1(13.76,-29.44) 14.954,-29.44 P1.18@14.955,-29.441 ; P1.18@15.436,-28.96 cw(c15.436,-29.643) 15.919,-29.16 P1.18@16.239,-29.16
  Signal Layer 2 w0.254: v1(13.76,-29.44) 13.921,-29.601 13.934,-29.614 cw(c9.69,-33.823) 14.581,-30.387 cw(c5.981,-36.426) 16.49,-36.425 ccw(c19.048,-36.427) 16.683,-37.403 ccw(c21.838,-35.273) 17.8,-39.121 v1(17.906,-39.091) ccw(c17.906,-37.796) 19.2,-37.796 19.2,-28.88 ccw(c17.815,-28.88) 18.795,-27.902 ; 14.956,-16.464 14.956,-23.359 ccw(c16.655,-23.359) 15.453,-24.56 ; 14.956,-16.463 cw(c17.996,-16.463) 15.847,-14.313 15.998,-14.162 cw(c17.871,-16.034) 17.871,-13.386 17.968,-13.386 17.976,-13.394 v1@17.976,-13.399 ; 15.454,-24.56 18.794,-27.901
  other v1: 18.136,-13.399
DQ9: P1.17 U1.44 U2.44 | length 44.4
  Signal Layer 2 w0.254: v1(10.776,-29.28) cw(c10.776,-33.369) 13.667,-30.476 cw(c8.405,-35.729) 15.84,-35.727 15.84,-35.729 ccw(c22.832,-35.729) 17.888,-40.673 17.889,-40.674 v1(17.906,-40.691) ccw(c17.906,-38.982) 17.968,-40.689 ccw(c17.906,-38.982) 19.614,-38.982 19.614,-28.88 ccw(c17.815,-28.88) 19.087,-27.608 15.84,-24.361 ; 15.839,-24.36 cw(c16.975,-23.226) 15.37,-23.226 15.37,-17.04 cw(c16.939,-17.04) 15.829,-15.931 16.003,-15.757 cw(c17.862,-17.614) 17.862,-14.986 v1@17.968,-14.986
  other v1: 18.128,-14.986
DQ10: P1.16 U1.45 U2.45 | length 43.3
  Top Layer w0.254: v1(13.77,-31.68) 16.191,-31.68 cw(c16.191,-31.748) P1.16@16.239,-31.7
  Signal Layer 2 w0.254: v1(13.77,-31.68) 13.725,-31.787 cw(c9.988,-35.524) 15.273,-35.524 15.273,-35.526 15.273,-35.684 15.273,-35.686 ccw(c22.933,-35.686) 17.517,-41.102 17.518,-41.103 v1(17.906,-41.491) ; 16.304,-24.239 cw(c17.561,-22.984) 15.784,-22.984 15.784,-17.52 cw(c17.338,-17.52) 16.238,-16.423 16.239,-16.422 cw(c17.773,-17.954) 17.773,-15.786 v1@17.968,-15.786 ; 16.304,-24.24 19.38,-27.316 cw(c17.815,-28.88) 20.028,-28.88 20.028,-39.368 cw(c17.906,-39.368) v1@18.008,-41.488
  other v1: 18.128,-15.786
DQ11: P1.15 U1.47 U2.47 | length 44.5
  Signal Layer 2 w0.254: v1(10.821,-31.75) cw(c10.821,-35.353) 13.368,-32.804 cw(c9.848,-36.323) 14.825,-36.319 ccw(c20.847,-36.321) 15.121,-38.186 15.124,-38.197 ccw(c30.535,-33.161) 17.44,-42.72 17.807,-43.09 v1(17.906,-43.091) ; 16.564,-17.756 ccw(c17.449,-18.64) 16.198,-18.64 16.198,-22.923 ccw(c17.707,-22.923) 16.639,-23.989 ; 16.565,-17.755 cw(c17.457,-18.648) 17.457,-17.386 v1@17.968,-17.386 ; 16.64,-23.99 19.698,-27.048 cw(c17.902,-28.844) 20.442,-28.844 20.442,-40.826 cw(c17.902,-40.826) 19.698,-42.622 19.68,-42.64 ; v1@17.915,-43.091 18.594,-43.091 ccw(c18.594,-41.555) 19.655,-42.664 ccw(c18.594,-41.555) 19.678,-42.642 ccw(c18.594,-41.555) 19.679,-42.641
  other v1: 18.128,-17.386
DQ12: P1.14 U1.48 U2.48 | length 43.5
  Top Layer w0.254: v1(13.571,-34.416) 15.743,-34.416 15.919,-34.24 P1.14@16.239,-34.24
  Signal Layer 2 w0.254: v1(13.571,-34.416) cw(c11.905,-36.082) 14.26,-36.08 ccw(c20.861,-36.08) 14.514,-37.893 ccw(c30.886,-33.213) 16.434,-42.218 16.439,-42.225 ccw(c22.673,-38.332) 17.475,-43.529 17.477,-43.531 17.789,-43.842 ccw(c17.906,-43.725) v1(17.906,-43.891) ; 17.02,-23.784 20.112,-26.877 cw(c18.316,-28.673) 20.856,-28.673 20.856,-41.44 cw(c18.48,-41.44) 20.16,-43.12 20.133,-43.147 cw(c18.337,-41.351) 18.37,-43.89 cw(c18.337,-41.351) 18.337,-43.891 v1@18.057,-43.891 ; 17.019,-23.784 cw(c18.004,-22.8) 16.612,-22.8 16.612,-19.066 cw(c17.574,-19.066) 16.894,-18.386 cw(c17.377,-18.87) 17.377,-18.186 v1@17.968,-18.186
  Bottom Layer w0.254: U1.48 U1.48@17.993,-18.16
  other v1: 18.128,-18.186
DQ13: P1.13 U1.50 U2.50 | length 43.5
  Signal Layer 2 w0.254: v1(10.501,-34.45) 10.501,-36.169 ccw(c13.041,-36.169) 11.245,-37.965 14.327,-41.047 17.902,-45.467 17.901,-45.485 v1(17.906,-45.491) ; 17.233,-19.967 ccw(c17.733,-20.467) 17.026,-20.467 17.026,-22.664 ccw(c18.332,-22.664) 17.4,-23.579 ccw(c18.332,-22.664) 17.408,-23.587 20.526,-26.705 cw(c18.73,-28.501) 21.27,-28.501 21.27,-41.36 ; 17.234,-19.967 cw(c17.669,-20.402) 17.237,-19.963 cw(c17.669,-20.402) 17.669,-19.786 v1@17.968,-19.786 ; v1@18.094,-45.489 ccw(c17.995,-42.191) 20.328,-44.524 ccw(c18.033,-42.23) 21.278,-42.23 21.278,-41.36
  other v1: 18.128,-19.786
DQ14: P1.10 U1.51 U2.51 | length 39.8
  Top Layer w0.254: v1(13.28,-40.96) 13.28,-40.81 P1.10@14.645,-39.445
  Signal Layer 2 w0.254: v1(13.28,-40.96) 13.314,-40.995 14.784,-42.498 14.84,-42.581 16.352,-44.818 16.368,-44.835 17.79,-46.289 17.896,-46.29 v1(17.906,-46.291) 18.176,-46.291 ; v1@17.968,-20.586 17.924,-20.586 ccw(c17.924,-21.044) 17.6,-20.72 ccw(c17.986,-21.106) 17.44,-21.106 17.44,-22.48 ccw(c18.777,-22.48) 17.831,-23.425 20.724,-26.318 ; 18.177,-46.291 ccw(c18.177,-42.731) 21.737,-42.731 21.737,-28.377 ccw(c19.197,-28.377) 21.083,-26.677 ccw(c19.197,-28.377) 20.993,-26.581 20.726,-26.315
  Bottom Layer w0.254: v1(17.906,-46.291) 18.166,-46.291 18.036,-46.16 v1(17.906,-46.291)
  other v1: 18.128,-20.586
DQ15: P1.9 U1.53 U2.53 | length 41.1
  Signal Layer 2 w0.254: v1@10.607,-39.407 10.841,-39.407 14.125,-42.691 15.219,-44.582 15.226,-44.591 17.148,-47.324 17.167,-47.342 17.759,-47.895 17.864,-47.892 v1(17.906,-47.891) ; v1(17.984,-22.176) 17.984,-22.209 17.984,-22.242 17.984,-22.304 21.563,-25.883 cw(c20.145,-27.301) 22.151,-27.301 22.151,-43.964 cw(c18.528,-43.964) 21.091,-46.524 20.91,-46.705 cw(c18.05,-43.848) v1@18.05,-47.891
  Bottom Layer w0.254: v1(17.906,-47.891) U2.53@17.935,-47.92
  other v1: 10.72,-39.36
GND: C1.1 C2.1 C3.1 C4.1 C5.1 C6.1 C7.1 C8.1 C9.1 C10.1 C11.1 C12.1 C13.1 C14.1 C15.1 P1.12 P1.30 U1.6 U1.12 U1.28 U1.41 U1.46 U1.52 U1.54 U2.6 U2.12 U2.28 U2.41 U2.46 U2.52 U2.54 U3.3 U4.1 | length 5.9
  Top Layer w0.508: P1.12 15.51,-36.781 15.765,-37.036 P1.12@16.655,-37.036 ; P1.30 P1.30@16.18,-13.92
  Top Layer w1: 13.462,-36.774 13.657,-36.774 13.722,-36.839 13.764,-36.796 13.808,-36.796 15.509,-36.781 P1.12@15.51,-36.781 ; P1.30@15.68,-13.91 P1.30@16.409,-13.91
  Bottom Layer w0.508: 5.6,-19.04 5.654,-18.986 v1(6.668,-18.986) ; v1(6.603,-44.692) v1(6.603,-44.692) ; U2.12 6.606,-39.885 v1(6.611,-39.879) ; v1(6.657,-14.189) 6.665,-14.189 U1.12 ; U2.54 17.91,-48.695 v1(17.91,-48.731) ; U1.52 17.975,-21.38 v1(17.977,-21.38)
  other v1: 0.8,-49.6 1.92,-49.6 3.04,-49.6 4.16,-49.6 22.24,-48.72 14.24,-48.16 15.2,-48.16 16.16,-48.16 0.8,-48 20.48,-47.84 21.6,-47.84 17.906,-47.091 22.24,-46.8 0.8,-46.24 1.92,-46.24 3.04,-46.24 0.8,-44.64 1.92,-44.64 17.906,-42.291 17.907,-38.289 5.28,-35.52 5.28,-34.72 5.28,-33.12 5.28,-32.32 13.12,-31.04 13.12,-28.64 0.64,-26.88 0.64,-25.92 10.385,-25.44 12.8,-25.44 13.92,-25.44 0.64,-24.96 13.28,-22.56 13.28,-19.84 13.28,-17.12 17.968,-16.586 13.28,-15.2 17.968,-12.586 0.96,-5.6 0.96,-4.16 2.08,-4.16 3.23,-4.168 22.24,-3.76 20.48,-2.88 21.6,-2.88 0.96,-2.72 13.92,-2.56 15.04,-2.56 16.16,-2.56 17.968,-2.186 22.24,-1.84 0.96,-1.28 2.08,-1.28 5.44,-1.28
  other v3: 13.942,-13.919
  other v4: 13.19,-35.687
RAS: P1.32 U1.18 U2.18 | length 39.8
  Top Layer w0.254: v1(13.819,-11.48) 15.501,-11.48 15.621,-11.36 cw(c15.621,-11.428) P1.32@15.669,-11.38 ; P1.32@16.118,-11.43 ccw(c16.118,-11.259) P1.32@16.239,-11.38
  Signal Layer 1 w0.254: 4.452,-11.868 4.452,-21.838 ccw(c6.733,-21.838) 5.12,-23.45 8.514,-26.844 cw(c7.118,-28.24) 9.092,-28.24 9.092,-32.203 cw(c5.919,-32.203) 8.163,-34.445 cw(c6.606,-32.887) v1(6.606,-35.091) ; 4.452,-11.866 cw(c7.091,-11.866) 5.225,-10.001 cw(c6.679,-11.455) v1(6.679,-9.398) 8.82,-9.398 8.822,-9.398 cw(c8.822,-16.197) 13.628,-11.388 13.729,-11.39 v1(13.819,-11.48)
  Bottom Layer w0.254: U2.18@6.576,-35.12 v1(6.606,-35.091) ; U1.18 v1(6.679,-9.398)
VCC: C1.2 C2.2 C3.2 C4.2 C5.2 C6.2 C7.2 C8.2 C9.2 C10.2 C11.2 C12.2 C13.2 C14.2 U1.1 U1.3 U1.9 U1.14 U1.27 U1.37 U1.43 U1.49 U2.1 U2.3 U2.9 U2.14 U2.27 U2.37 U2.43 U2.49 U3.5 U4.2 | length 42.4
  Bottom Layer w0.508: C3.2@3.929,-16.701 4.07,-16.56 6.642,-16.56 U1.9 ; C2.2@3.929,-12.51 4.006,-12.586 U1.14 ; C10.2@3.95,-47.91 C10.2@4,-47.86 ; C8.2@4.052,-38.291 U2.14 U2.14@6.576,-38.32 ; U3.5@4.145,-6.012 C1.2@4.145,-2.72 ; C1.2@4.32,-2.186 U1.27 ; C9.2@4.347,-42.32 4.376,-42.291 U2.9 ; 5.12,-28.72 5.12,-28.126 5.356,-27.891 U2.27 6.614,-27.899 7.775,-27.899 7.876,-28 ; 5.497,-21.36 6.642,-21.36 U1.3 ; U2.3 6.597,-47.099 5.729,-47.099 5.28,-47.547 5.28,-48.21 5.76,-48.69 U2.1 8.198,-48.69 ccw(c8.198,-48.518) 8.32,-48.64 ; U1.1 7.744,-22.986 ccw(c7.744,-22.624) 8,-22.88 ; U2.49 20.61,-44.691 C12.2@20.64,-44.72 ; U2.43@17.935,-39.92 U2.43 20.002,-39.891 20.032,-39.92 C11.2@20.074,-39.878 ; U2.37@17.935,-35.12 U2.37 20.482,-35.091 ccw(c20.482,-34.867) C13.2 ; U1.49 20.021,-18.986 20.047,-18.96 C6.2@20.074,-18.987 ; U1.43 19.984,-14.186 20.01,-14.16 C5.2@20.074,-14.224 ; U1.37 20.348,-9.386 ccw(c20.348,-8.973) C14.2
  other v2: 10.08,-12.8 10.72,-12.8 11.36,-12.8
VDD: C15.2 P1.11 U4.3 | length 16.3
  Bottom Layer w1: U4.3@5.043,-25.037 5.446,-25.44 7.84,-25.44 9.653,-27.253 10.134,-27.253 11.84,-28.96 v3(11.84,-36.8)
WE: P1.27 U1.16 U2.16 | length 37.4
  Signal Layer 1 w0.254: 5.28,-12.417 5.28,-21.68 ccw(c7.113,-21.68) 5.817,-22.976 9.176,-26.335 cw(c7.38,-28.132) 9.92,-28.132 9.92,-32.788 cw(c5.642,-32.788) 8.667,-35.813 8.626,-35.854 cw(c6.606,-33.832) v1(6.606,-36.691) ; 5.28,-12.416 cw(c6.741,-12.416) 5.709,-11.382 cw(c6.668,-12.344) v1(6.668,-10.986) 6.711,-10.986 cw(c6.711,-12.809) 8,-11.52 cw(c6.841,-12.679) 8.468,-12.481 ccw(c10.367,-12.481) 8.48,-12.694 ccw(c10.367,-12.481) 9.024,-13.824 10.314,-15.114 cw(c8.949,-16.48) v1(10.88,-16.48)
pads on no net: P1.29 U1.40 U2.40 U3.1

## Polygon pours and split planes (outlines as drawn)
VCC on Bottom Layer "power" (solid, remove dead copper, pour order 41): 12.16,-36.16 ccw(c12.96,-36.16) 12.96,-36.96 13.6,-36.96 ccw(c13.6,-36.187) 14.146,-36.734 16.203,-34.677 cw(c16.689,-35.163) 16.689,-34.476 cw(c16.877,-35.56) 16.878,-34.459 17.207,-34.459 cw(c17.208,-35.08) 17.647,-34.642 cw(c16.887,-36.953) 17.854,-34.72 17.854,-44.705 8.593,-48.96 6.494,-48.96 4.96,-48.96 cw(c4.96,-48.16) 4.16,-48.16 ccw(c4.08,-47.92) 4.32,-47.84 4.32,-47.68 cw(c5.203,-47.76) 5.283,-46.877 6.494,-46.877 6.494,-31.68 4.473,-31.68 1.6,-28.866 1.6,-26.24 2.56,-26.24 2.56,-23.04 3.695,-21.905 4.483,-21.117 6.4,-21.117 6.4,-1.92 8.774,-1.92 10.184,-2.504 15.68,-5.44 17.76,-6.72 17.76,-9.44 17.76,-19.84 cw(c17.76,-17.44) 15.36,-17.44 15.36,-14.66 15.36,-13.892 ccw(c14.268,-13.892) 15.04,-13.12 ccw(c14.268,-13.892) 14.267,-12.8 13.92,-12.8 ccw(c13.92,-14.345) 12.827,-13.253 12.339,-13.741 ccw(c14.135,-15.538) 11.595,-15.538 11.595,-16.079 11.595,-21.744 cw(c10.385,-21.744) 11.24,-22.6 9.44,-24.4 9.44,-27.603 9.881,-27.603 cw(c9.881,-29.881) 12.16,-29.881
GND on Bottom Layer "ground" (solid, remove dead copper, pour order 42): 0,0 23.2,0 23.2,-50.8 0,-50.8
GND on Top Layer "ground" (solid, remove dead copper, pour order 43): 21.59,-50.8 ccw(c20.32,-50.8) 20.32,-49.53 ccw(c20.32,-50.8) 19.05,-50.8 17.145,-50.8 0,-50.8 0,0 9.271,0 17.145,0 19.05,0 ccw(c20.32,0) 20.32,-1.27 ccw(c20.32,0) 21.59,0 23.2,0 23.2,-50.8
VCC on Top Layer "power" (solid, pour order 44): 9.826,-12.803 9.826,-12.782 cw(c10.052,-12.782) 10.052,-12.556 11.379,-12.556 cw(c11.379,-12.779) 11.605,-12.779 11.605,-12.797 cw(c11.355,-12.797) 11.355,-13.047 10.073,-13.047 10.073,-13.05 10.07,-13.05 cw(c10.07,-12.809) 9.829,-12.809
no net on Top Solder "power" (solid, pour order 33): 9.826,-12.803 9.826,-12.782 cw(c10.052,-12.782) 10.052,-12.556 11.379,-12.556 cw(c11.379,-12.779) 11.605,-12.779 11.605,-12.797 cw(c11.355,-12.797) 11.355,-13.047 10.073,-13.047 10.073,-13.05 10.07,-13.05 cw(c10.07,-12.809) 9.829,-12.809
GND on Signal Layer 1 "ground" (solid, remove dead copper, pour order 35): 0,0 23.2,0 23.2,-50.8 0,-50.8
GND on Signal Layer 2 "ground" (solid, remove dead copper, pour order 36): 0,0 23.2,0 23.2,-50.8 0,-50.8

## Keep-outs
Keep-Out Layer:
  the board outline again, w0.1

## Silkscreen, mask and mechanical layers (free items; w line width, h text height)
Top Overlay:
  text "THIS SIDE FACES OUTWARD" at 20.96,-9.72 h2 r270
  text "SDRAM XS-DS v3.0 (C)2021 Alexey Melnikov" at 19.04,-11.36 h1.52 r270
  text "JLCJLCJLCJLC" at 1.524,-20.765 h1.52 r270